# Altium PCB MainBoard_Layout_V2.PcbDoc
Units mil, origin at the board's own origin, x right, y up, seen from the top; angles counter-clockwise.
Board outline 4300 x 3500 mil, 4 copper layers (Top Layer 1, Top Layer, Bottom Layer, Bottom Layer 1), stack 19.156 mil thick; 78 components, 222 nets, 502 pads, 0 vias.
Unrouted connection lines stored in the file: 272.
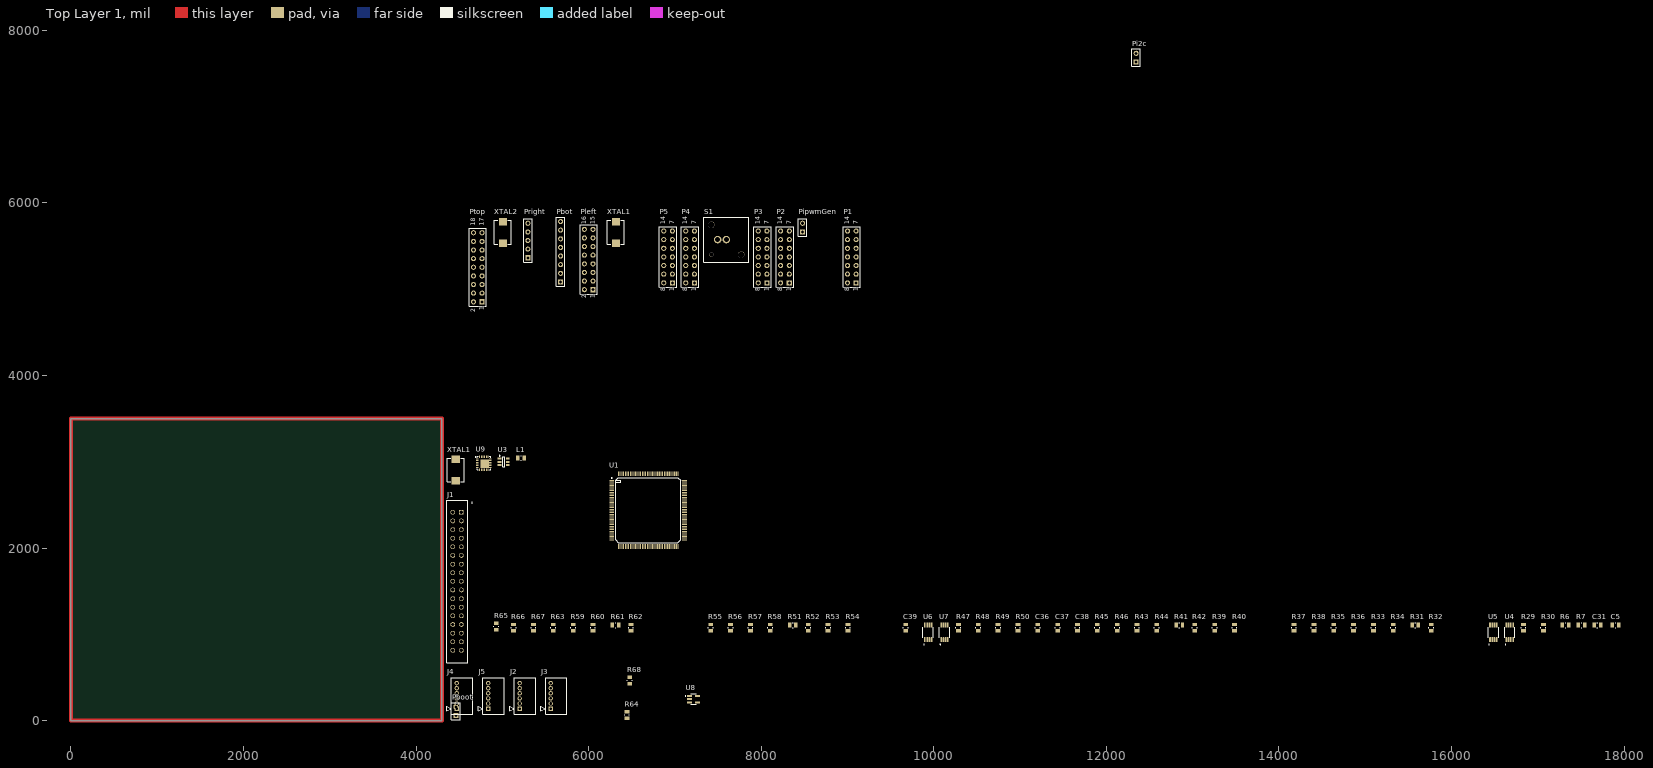
[diagram p0: Top Layer 1 view]
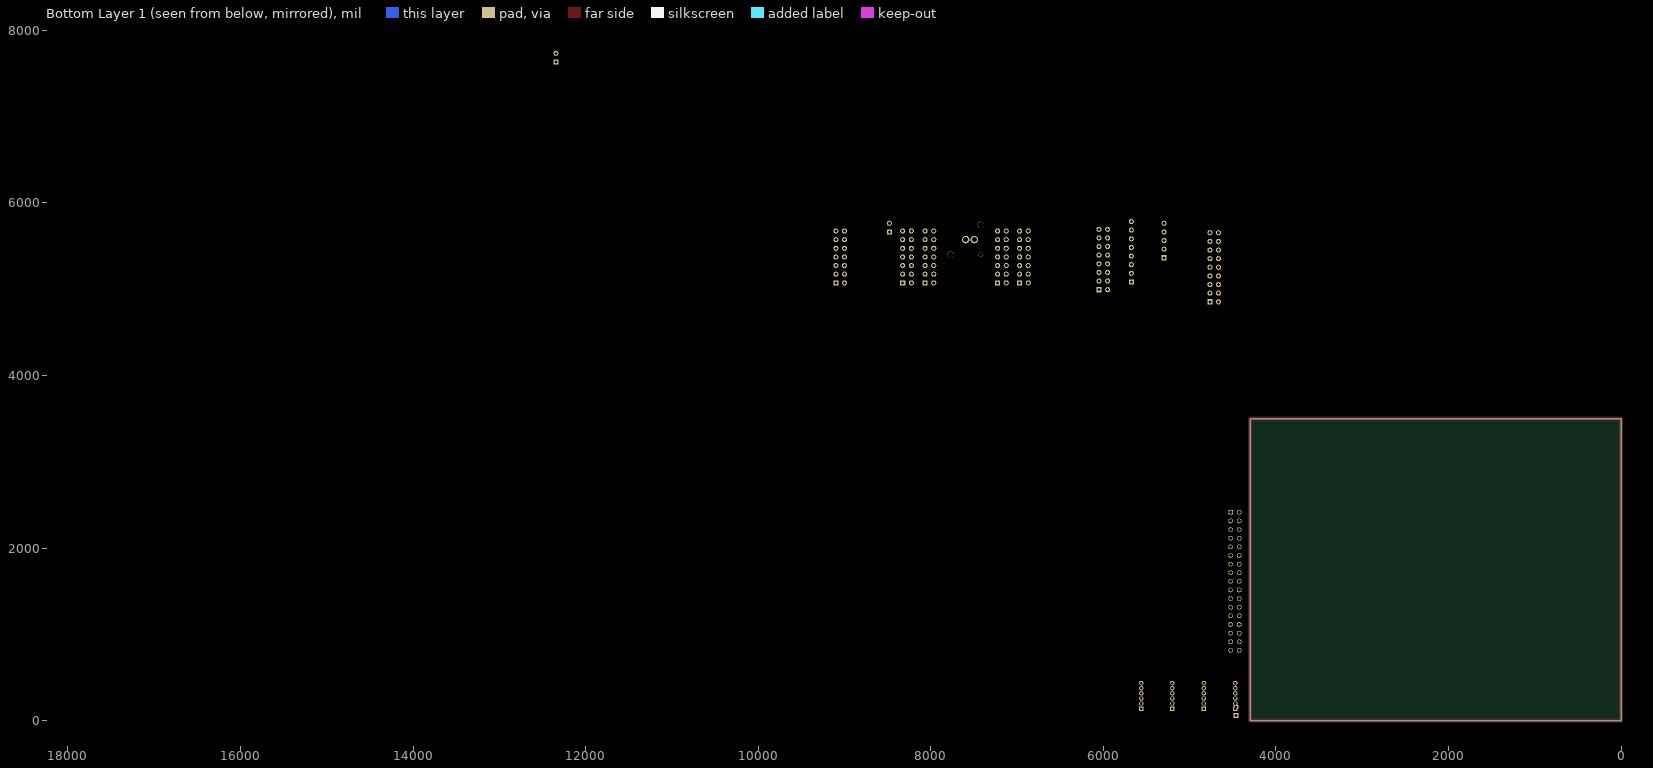
[diagram p1: Bottom Layer 1 view, seen from below]

## Layer stack, top to bottom
Top Solder: solder mask 0.4, Solder Resist, Dk 3.5
Top Layer 1: signal copper 1.378
Dielectric 2: prepreg 2.8, PP-006, Dk 4.1
Top Layer: signal copper 1.4
Dielectric 1: core 8, Core-025, Dk 4.6
Bottom Layer: signal copper 1.4
Dielectric 3: prepreg 2.8, PP-006, Dk 4.1
Bottom Layer 1: signal copper 1.378
Bottom Solder: solder mask 0.4, Solder Resist, Dk 3.5

## Board outline
0,0 4300,0 4300,3500 0,3500

## Design rules (kind name [scope] priority, off if disabled: settings)
Clearance [All] p1: gap=10 ignorepadtopadclearanceinfootprint=FALSE except(0: Arc-Hole Track-Hole SMDPad-Hole THPad-Hole Via-Hole Fill-Hole Poly-Hole Region-Hole Text-Hole)
DiffPairsRouting [All] p1: maxlimit=10 minlimit=10 mostfreqgap=10 toplayer_minwidth=15 toplayer_maxwidth=15 toplayer_prefwidth=15 midlayer1_minwidth=15 midlayer1_maxwidth=15 midlayer1_prefwidth=15 midlayer2_minwidth=15 midlayer2_maxwidth=15 midlayer2_prefwidth=15 bottomlayer_minwidth=15 bottomlayer_maxwidth=15 bottomlayer_prefwidth=15 maxuncoupledlength=500
MatchedLengths "Schematic Matched Net Lengths_3" [InNet('RD_P')] p1: tolerance=100 checknetsindiffpair=TRUE checkdiffpairvsdiffpair=FALSE checkxsignals=FALSE checkothers=FALSE
MatchedLengths "Schematic Matched Net Lengths_2" [InNet('RD_N')] p2: tolerance=100 checknetsindiffpair=TRUE checkdiffpairvsdiffpair=FALSE checkxsignals=FALSE checkothers=FALSE
MatchedLengths "Schematic Matched Net Lengths_1" [InNet('TD_N')] p3: tolerance=100 checknetsindiffpair=TRUE checkdiffpairvsdiffpair=FALSE checkxsignals=FALSE checkothers=FALSE
MatchedLengths "Schematic Matched Net Lengths" [InNet('TD_P')] p4: tolerance=100 checknetsindiffpair=TRUE checkdiffpairvsdiffpair=FALSE checkxsignals=FALSE checkothers=FALSE
PolygonConnect [All] p1: connectstyle=Relief reliefconductorwidth=10 reliefentries=4 polygonreliefangle="90 Angle" airgapwidth=10
RoomDefinition U_Mainboard_RMII_Interface [InComponentClass('U_Mainboard_RMII_Interface')] p1: confinementstyle=ConfineIn formatcopy=TRUE lockcomponents=FALSE outline 4345,2720 5290,2720 5290,3190 4345,3190
RoomDefinition U_Mainboard_Power_Interface [InComponentClass('U_Mainboard_Power_Interface')] p2: confinementstyle=ConfineIn formatcopy=TRUE lockcomponents=FALSE outline 4345,660 4660,660 4660,2670 4345,2670
RoomDefinition U_Mainboard_MCU_Func [InComponentClass('U_Mainboard_MCU_Func')] p3: confinementstyle=ConfineIn formatcopy=TRUE lockcomponents=FALSE outline 4345,2720 5105,2720 5105,3190 4345,3190
RoomDefinition U_MainBoard_MCU_Breakout [InComponentClass('U_MainBoard_MCU_Breakout')] p4: confinementstyle=ConfineIn formatcopy=TRUE lockcomponents=FALSE outline 5755,1950 7755,1950 7755,2950 5755,2950
RoomDefinition U_Mainboard_Encoder_Interface [InComponentClass('U_Mainboard_Encoder_Interface')] p5: confinementstyle=ConfineIn formatcopy=TRUE lockcomponents=FALSE outline 4345,60 5765,60 5765,615 4345,615
RoomDefinition U_Mainboard_Motordriver_Interface [InComponentClass('U_Mainboard_Motordriver_Interface')] p6: confinementstyle=ConfineIn formatcopy=TRUE lockcomponents=FALSE outline 4295,3860 4785,3860 4785,4240 4295,4240
RoomDefinition MainBoard_Top [InComponentClass('MainBoard_Top')] p7: confinementstyle=ConfineIn formatcopy=TRUE lockcomponents=FALSE outline 4400,0 4695,0 4695,320 4400,320
RoutingVias [All] p1: holewidth=28 width=50 viastyle="Through Hole" minholewidth=28 minwidth=50 maxholewidth=28 maxwidth=50
SolderMaskExpansion [All] p1: expansion=4 istentingtop=FALSE
Width [All] p1: maxlimit=10 minlimit=10 preferedwidth=10
29 further rules are at their usual default settings.

## Classes and differential pairs
component class U_Mainboard_RMII_Interface: C1 C2 C3 C4 C30 C44 C45 C46 C47 C48 C49 C50 J6 L1 R1 R2 R3 R4 R69 R70 R71 R72 R73 R74 R75 R76 R77 R78 R79 R80 R81 R82 R83 R84 R85 R86 T1 U3 U9 XTAL1
component class U_Mainboard_Power_Interface: J1
component class U_Mainboard_MCU_Func: C1 C2 C3 C4 C30 HW? Pbot PipwmGen Pleft Pright Ptop R1 R2 R3 R4 S1 U3 XTAL1 XTAL2
component class U_MainBoard_MCU_Breakout: Pi2c R19 R20 R21 U1
component class U_Mainboard_Motordriver_Interface: C1 C2 C3 C4 C30 HW? P1 P2 P3 P4 P5 R1 R2 R3 R4 R19 R20 R21 U3
component class U_Mainboard_Encoder_Interface: C5 C31 C36 C37 C38 C39 J2 J3 J4 J5 R6 R7 R29 R30 R31 R32 R33 R34 R35 R36 R37 R38 R39 R40 R41 R42 R43 R44 R45 R46 R47 R48 R49 R50 R51 R52 R53 R54 R55 R56 R57 R58 R59 R60 R61 R62 R63 R64 R65 R66 R67 R68 U4 U5 U6 U7 U8 Um1 Up1
component class MainBoard_Top: Pboot
differential pair TD: +TD_P -TD_N
differential pair RD: +RD_P -RD_N

## Components (designator, comment, footprint, x,y, rotation, side; value= is the part's Value field where it differs from the comment)
C5 "10nF 50V" 0805 17900,1108 r0 top value=10nF
C31 "10nF 50V" 0805 17690,1108 r0 top value=10nF
C36 "10nF 50V" 0805 11205,1078 r90 top value=10nF
C37 "1uF 50V" 0805 11435,1078 r90 top value=1uF
C38 "10nF 50V" 0805 11665,1078 r90 top value=10nF
C39 "10nF 50V" 0805 9675,1078 r90 top value=10nF
J1 "0.1\" Header Female 34" SAMTEC_ESQ-117-12-L-D 4525,2415 r90 top
J2 "1.5mm" "6POS JST" 5200,140 r90 top
J3 "1.5mm" "6POS JST" 5560,140 r90 top
J4 "1.5mm" "6POS JST" 4470,140 r90 top
J5 "1.5mm" "6POS JST" 4835,140 r90 top
L1 "IND 100UH 50MA 4 OHM SMD" 0805 5215,3045 r0 top value=100uH
P1 "Motor1" HDR2X7_CEN 9100,5075 r90 top
P2 "Motor2" HDR2X7_CEN 8325,5075 r90 top
P3 "Motor3" HDR2X7_CEN 8065,5075 r90 top
P4 "Motor4" HDR2X7_CEN 7225,5075 r90 top
P5 "Motor5" HDR2X7_CEN 6970,5075 r90 top
Pboot "Header 2" HDR1X2 4460,60 r90 top
Pbot "Bottom Side Connector - Extra Pins" HDR1X8 5675,5085 r90 top
Pi2c "Header 2" HDR1X2 12345,7635 r90 top
PipwmGen "Header 2" HDR1X2 8480,5665 r90 top
Pleft "Left Side Connector Extra Pins" HDR2X8 6050,4995 r90 top
Pright "Right Side Connector - Extra Pins" HDR1X5 5295,5365 r90 top
Ptop "Top side Connector Extra Pins" HDR2X9 4765,4855 r90 top
R6 "330" 0805 17320,1108 r0 top
R7 "100k" 0805 17505,1108 r0 top
R29 "330" 0805 16835,1078 r90 top
R30 "100k" 0805 17065,1078 r90 top
R31 "330" 0805 15580,1108 r0 top
R32 "100k" 0805 15765,1078 r90 top
R33 "330" 0805 15095,1078 r90 top
R34 "100k" 0805 15325,1078 r90 top
R35 "330" 0805 14635,1078 r90 top
R36 "100k" 0805 14865,1078 r90 top
R37 "330" 0805 14175,1078 r90 top
R38 "100k" 0805 14405,1078 r90 top
R39 "330" 0805 13255,1078 r90 top
R40 "100k" 0805 13485,1078 r90 top
R41 "330" 0805 12845,1108 r0 top
R42 "100k" 0805 13025,1078 r90 top
R43 "64.9k" 0805 12355,1078 r90 top
R44 "64.9k" 0805 12585,1078 r90 top
R45 "64.9k" 0805 11895,1078 r90 top
R46 "64.9k" 0805 12125,1078 r90 top
R47 "330" 0805 10285,1078 r90 top
R48 "100k" 0805 10515,1078 r90 top
R49 "330" 0805 10745,1078 r90 top
R50 "100k" 0805 10975,1078 r90 top
R51 "330" 0805 8365,1108 r0 top
R52 "100k" 0805 8545,1078 r90 top
R53 "330" 0805 8775,1078 r90 top
R54 "100k" 0805 9005,1078 r90 top
R55 "330" 0805 7415,1078 r90 top
R56 "100k" 0805 7645,1078 r90 top
R57 "330" 0805 7875,1078 r90 top
R58 "100k" 0805 8105,1078 r90 top
R59 "330" 0805 5820,1078 r90 top
R60 "100k" 0805 6050,1078 r90 top
R61 "330" 0805 6310,1108 r0 top
R62 "100k" 0805 6490,1078 r90 top
R63 "100k" 0805 5590,1078 r90 top
R64 "64.9k" 0805 6445,66.75 r90 top
R65 "64.9k" 0805 4930,1093 r90 top
R66 "64.9k" 0805 5130,1078 r90 top
R67 "64.9k" 0805 5360,1078 r90 top
R68 "100k" 0805 6475,465 r90 top
S1 "SPST-NO 0.3A 28V" PB300STQ 7595,5575 r0 top
U1 "STM32H743ZI" STM32H7 6690,2440 r0 top
U3 "USBLC6-4SC6" SOT23-6L 5015,3000 r0 top
U4 "OP AMP DUAL" 8-MSOP 16675,1023 r90 top
U5 "OP AMP DUAL" 8-MSOP 16485,1023 r90 top
U6 "OP AMP DUAL" 8-MSOP 9935,1023 r90 top
U7 "OP AMP DUAL" 8-MSOP 10125,1023 r90 top
U8 "OP AMP SINGLE" SOT95P280X145-5N 7215,250 r0 top
U9 "LAN8742A-CZ-TR" "24-QFN (4x4)" 4785,2985 r0 top
XTAL1 "CRYSTAL 25.0000MHZ 8PF SMD" SMD-2 4460,2905 r90 top
XTAL1 "CRYSTAL 25.0000MHZ 8PF SMD" SMD-2 6315,5660 r90 top
XTAL2 "CRYSTAL 32.7680KHZ 12.5PF SMD" SMD-2 5005,5660 r90 top

## Footprints (in the part's own frame and the unit in brackets; to place one, negate y for a bottom-side part, rotate by r counter-clockwise, add the part's x,y. Pads: shape width x height; smd on the part's side, far side on the other; paste and mask are expansions set on the pad)
"6POS JST" [mil]
  rect 50x50 hole 30 mask+0: 1(0,0)
  round 50 hole 30 mask+0: 2(59.06,0) 3(118.11,0) 4(177.17,0) 5(236.22,0) 6(295.28,0)
  silkscreen extent -64,-186 359,115, body extent 0,0 10,10, height 10
8-MSOP [mm]
  rrect25% 1.47x0.48 smd: 1(-2.15,0.975) 2(-2.15,0.325) 3(-2.15,-0.325) 4(-2.15,-0.975) 5(2.15,-0.975) 6(2.15,-0.325) 7(2.15,0.325) 8(2.15,0.975)
  silkscreen extent -3.62,-1.54 1.5,1.54, body extent -2.55,-1.6 2.6,1.6, height 1.09
"24-QFN (4x4)" [mm]
  rect 0.71x0.27 smd: 1(-1.9,1.25) 2(-1.9,0.75) 3(-1.9,0.25) 4(-1.9,-0.25) 5(-1.9,-0.75) 6(-1.9,-1.25) 13(1.9,-1.25) 14(1.9,-0.75) 15(1.9,-0.25) 16(1.9,0.25) 17(1.9,0.75) 18(1.9,1.25)
  rect 0.27x0.71 smd: 7(-1.25,-1.9) 8(-0.75,-1.9) 9(-0.25,-1.9) 10(0.25,-1.9) 11(0.75,-1.9) 12(1.25,-1.9) 19(1.25,1.9) 20(0.75,1.9) 21(0.25,1.9) 22(-0.25,1.9) 23(-0.75,1.9) 24(-1.25,1.9)
  rect 2.5x2.5 smd: 25(0.25,-0.25)
  silkscreen extent -2.55,-2 2,2, body extent -2.05,-2.04 2.05,2.05, height 1.4
0805 [mil]
  rect 40x55 smd: 1(-37,0) 2(37,0)
  silkscreen extent -4,-28 4,28, body extent -47,-28 47,28, height 24
HDR1X2 [mm] "Connector; Header; 2 Position"
  rect 1.5x1.5 hole 0.9: 1(0,0)
  round 1.5 hole 0.9: 2(2.54,0)
  silkscreen extent -1.27,-1.27 3.81,1.27
HDR1X5 [mm] "Connector; Header; 5 Position"
  rect 1.5x1.5 hole 0.9: 1(0,0)
  round 1.5 hole 0.9: 2(2.54,0) 3(5.08,0) 4(7.62,0) 5(10.16,0)
  silkscreen extent -1.27,-1.27 11.43,1.27
HDR1X8 [mm] "Connector; Header; 8 Position"
  rect 1.5x1.5 hole 0.9: 1(0,0)
  round 1.5 hole 0.9: 2(2.54,0) 3(5.08,0) 4(7.62,0) 5(10.16,0) 6(12.7,0) 7(15.24,0) 8(17.78,0)
  silkscreen extent -1.27,-1.27 19.05,1.27
HDR2X7_CEN [mm] "Connector; Header; 7x2 Position"
  rect 1.5x1.5 hole 0.9: 1(0,0)
  round 1.5 hole 0.9: 2(2.54,0) 3(5.08,0) 4(7.62,0) 5(10.16,0) 6(12.7,0) 7(15.24,0) 8(0,2.54) 9(2.54,2.54) 10(5.08,2.54) 11(7.62,2.54) 12(10.16,2.54) 13(12.7,2.54) 14(15.24,2.54)
  silkscreen extent -1.27,-1.27 16.51,3.81
HDR2X8 [mm] "Connector; Header; 8x2 Position"
  rect 1.5x1.5 hole 0.9: 1(0,0)
  round 1.5 hole 0.9: 2(0,2.54) 3(2.54,0) 4(2.54,2.54) 5(5.08,0) 6(5.08,2.54) 7(7.62,0) 8(7.62,2.54) 9(10.16,0) 10(10.16,2.54) 11(12.7,0) 12(12.7,2.54) 13(15.24,0) 14(15.24,2.54) 15(17.78,0) 16(17.78,2.54)
  silkscreen extent -1.27,-1.27 19.05,3.81
HDR2X9 [mm] "Connector; Header; 9x2 Position"
  rect 1.5x1.5 hole 0.9: 1(0,0)
  round 1.5 hole 0.9: 2(0,2.54) 3(2.54,0) 4(2.54,2.54) 5(5.08,0) 6(5.08,2.54) 7(7.62,0) 8(7.62,2.54) 9(10.16,0) 10(10.16,2.54) 11(12.7,0) 12(12.7,2.54) 13(15.24,0) 14(15.24,2.54) 15(17.78,0) 16(17.78,2.54) 17(20.32,0) 18(20.32,2.54)
  silkscreen extent -1.27,-1.27 21.59,3.81
PB300STQ [mm] "SWITCH PUSH SPST-NO 0.3A 28V"
  round 2.175 hole 1.45: 1(0,0) 2(-2.54,0)
  round 1.86 hole 1.86 unplated: 3(-4.4,4.4) 5(4.4,-4.4)
  round 1.2 hole 1.2 unplated: 4(-4.4,-4.4)
  silkscreen extent -6.6,-6.6 6.6,6.6, body extent -6.2,-6.2 6.2,6.2, height 10.35
SAMTEC_ESQ-117-12-L-D [mm]
  rect 1.37x1.37 hole 1.02: 1(0,0)
  round 1.37 hole 1.02: 2(0,2.54) 3(-2.54,0) 4(-2.54,2.54) 5(-5.08,0) 6(-5.08,2.54) 7(-7.62,0) 8(-7.62,2.54) 9(-10.16,0) 10(-10.16,2.54) 11(-12.7,0) 12(-12.7,2.54) 13(-15.24,0) 14(-15.24,2.54) 15(-17.78,0) 16(-17.78,2.54) 17(-20.32,0) 18(-20.32,2.54) 19(-22.86,0) 20(-22.86,2.54) 21(-25.4,0) 22(-25.4,2.54) 23(-27.94,0) 24(-27.94,2.54) 25(-30.48,0) 26(-30.48,2.54) 27(-33.02,0) 28(-33.02,2.54) 29(-35.56,0) 30(-35.56,2.54) 31(-38.1,0) 32(-38.1,2.54) 33(-40.64,0) 34(-40.64,2.54)
  silkscreen extent -44.3,-3.2 3.6,4.3, body extent -44.21,-2.95 3.54,4.25, height 9.5
SMD-2 [mm]
  rect 2.2x2.4 smd: 1(-3.15,0) 2(3.15,0)
  silkscreen extent -3.5,-2.5 3.5,2.5
SOT23-6L [mm]
  rect 1.1x0.6 smd: 1(-1.2,0.95) 2(-1.2,0) 3(-1.2,-0.95) 4(1.2,-0.95) 5(1.2,0) 6(1.2,0.95)
  silkscreen extent -1.32,-1.5 0.25,1.92, body extent -0.86,-1.51 0.87,1.52, height 1.25
SOT95P280X145-5N [mm]
  rrect25% 1.39x0.6 smd: 1(-1.165,0.95) 2(-1.165,0) 3(-1.165,-0.95) 4(1.165,-0.95) 5(1.165,0.95)
  silkscreen extent -2.46,-1.57 0.8,1.57, body extent -1.5,-1.5 1.5,1.5, height 1.45
STM32H7 [mm] "STM32H743ZI 144 pin"
  rect 0.3x1.45 smd: BOOT0(-5.75,10.725) PA3(-8.75,-10.725) PA4(-7.25,-10.725) PA5(-6.75,-10.725) PA6(-6.25,-10.725) PA7(-5.75,-10.725) PA14(8.75,10.725) PA15(8.25,10.725) PB0(-4.25,-10.725) PB1(-3.75,-10.725) PB2(-3.25,-10.725) PB3(-3.25,10.725) PB4(-3.75,10.725) PB5(-4.25,10.725) PB6(-4.75,10.725) PB7(-5.25,10.725) PB8(-6.25,10.725) PB9(-6.75,10.725) PB10(7.25,-10.725) PB11(7.75,-10.725) PC4(-5.25,-10.725) PC5(-4.75,-10.725) PC10(7.75,10.725) PC11(7.25,10.725) PC12(6.75,10.725) PD0(6.25,10.725) PD1(5.75,10.725) PD2(5.25,10.725) PD3(4.75,10.725) PD4(4.25,10.725) PD5(3.75,10.725) PD6(2.25,10.725) PD7(1.75,10.725) PDR_ON(-8.25,10.725) PE0(-7.25,10.725) PE1(-7.75,10.725) PE7(1.75,-10.725) PE8(2.25,-10.725) PE9(2.75,-10.725) PE10(4.25,-10.725) PE11(4.75,-10.725) PE12(5.25,-10.725) PE13(5.75,-10.725) PE14(6.25,-10.725) PE15(6.75,-10.725) PF11(-2.75,-10.725) PF12(-2.25,-10.725) PF13(-0.75,-10.725) PF14(-0.25,-10.725) PF15(0.25,-10.725) PG0(0.75,-10.725) PG1(1.25,-10.725) PG9(1.25,10.725) PG10(0.75,10.725) PG11(0.25,10.725) PG12(-0.25,10.725) PG13(-0.75,10.725) PG14(-1.25,10.725) PG15(-2.75,10.725) VCAP(8.25,-10.725) VDD(-8.75,10.725) VDD(-7.75,-10.725) VDD(-2.25,10.725) VDD(-1.25,-10.725) VDD(2.75,10.725) VDD(3.75,-10.725) VDD(8.75,-10.725) VSS(-8.25,-10.725) VSS(-1.75,-10.725) VSS(-1.75,10.725) VSS(3.25,-10.725) VSS(3.25,10.725)
  rect 1.45x0.3 smd: NRST(-10.725,-3.25) PA0(-10.725,-7.75) PA1(-10.725,-8.25) PA2(-10.725,-8.75) PA8(10.725,4.75) PA9(10.725,5.25) PA10(10.725,5.75) PA11(10.725,6.25) PA12(10.725,6.75) PA13(10.725,7.25) PB12(10.725,-8.75) PB13(10.725,-8.25) PB14(10.725,-7.75) PB15(10.725,-7.25) PC0(-10.725,-3.75) PC1(-10.725,-4.25) PC2(-10.725,-4.75) PC3(-10.725,-5.25) PC6(10.725,2.75) PC7(10.725,3.25) PC8(10.725,3.75) PC9(10.725,4.25) PC13(-10.725,5.75) PC14(-10.725,5.25) PC15(-10.725,4.75) PD8(10.725,-6.75) PD9(10.725,-6.25) PD10(10.725,-5.75) PD11(10.725,-5.25) PD12(10.725,-4.75) PD13(10.725,-4.25) PD14(10.725,-2.75) PD15(10.725,-2.25) PE2(-10.725,8.75) PE3(-10.725,8.25) PE4(-10.725,7.75) PE5(-10.725,7.25) PE6(-10.725,6.75) PF0(-10.725,4.25) PF1(-10.725,3.75) PF2(-10.725,3.25) PF3(-10.725,2.75) PF4(-10.725,2.25) PF5(-10.725,1.75) PF6(-10.725,0.25) PF7(-10.725,-0.25) PF8(-10.725,-0.75) PF9(-10.725,-1.25) PF10(-10.725,-1.75) PG2(10.725,-1.75) PG3(10.725,-1.25) PG4(10.725,-0.75) PG5(10.725,-0.25) PG6(10.725,0.25) PG7(10.725,0.75) PG8(10.725,1.25) PH0(-10.725,-2.25) PH1(-10.725,-2.75) VBAT(-10.725,6.25) VCAP(10.725,7.75) VDD(-10.725,-5.75) VDD(-10.725,0.75) VDD(10.725,-3.25) VDD(10.725,8.75) VDD33USB(10.725,2.25) VDDA(-10.725,-7.25) VREF+(-10.725,-6.75) VSS(-10.725,1.25) VSS(10.725,-3.75) VSS(10.725,1.75) VSS(10.725,8.25) VSSA(-10.725,-6.25)
  silkscreen extent -10.85,-9.6 9.6,9.6, body extent -10,-10 10,10, height 1.6

## Part data
C5 C31 C36 C38 C39: library part "CAP 10nF 50V", "CAP CER 10000PF 50V X7R 0805", Operating Temperature="-55°C ~ 125°C", Package=0805, Rating=50V, Temperature Coefficient=X7R, Tolerance=10%
C37: library part "CAP 1uF 50V", "CAP CER 1UF 50V X7R 0805", Operating Temperature="-55°C ~ 125°C", Package=0805, Rating=50V, Temperature Coefficient=X7R, Tolerance=10%
J1: library part "CN HDR 34POS 2x17", "Female Header THRU 34POS 2ROW 0.1\" (2.54mm) pitch"
J2 J3 J4 J5: library part "CN 6POS JST RA", "Conn Shrouded Header HDR 6 POS 1.5mm Solder RA Thru-Hole Box", Color=White, Contact Resistance=30mR, Current Rating=1A, Flammability Rating="UL94 V-0", Housing Color=Beige, Insulation Color=Natural, Insulation Resistance=500MR, Manufacturer=JST, Manufacturer Part Number=S6B-ZR(LF)(SN), Max Operating Temperature=85°C, Max Voltage Rating (AC)=50V, Min Operating Temperature=-25°C, Supplier Part Number 1=455-1673-ND, Body Plating=Tin, Category="Headers and Wire Housings", ComponentLink1Description=https://datasheet.ciiva.com/8052/80556-8052225.pdf?src-supplier=Element14, ComponentLink1URL=https://datasheet.ciiva.com/8052/80556-8052225.pdf?src-supplier=Element14, ComponentLink2Description=https://datasheet.ciiva.com/25617/0900766b81147f94-25617345.pdf?src-supplier=RSComponents, ComponentLink2URL=https://datasheet.ciiva.com/25617/0900766b81147f94-25617345.pdf?src-supplier=RSComponents, ComponentLink3Description=https://datasheet.ciiva.com/11752/0900766b8082f593-11752194.pdf?src-supplier=RSComponents, ComponentLink3URL=https://datasheet.ciiva.com/11752/0900766b8082f593-11752194.pdf?src-supplier=RSComponents, ComponentLink4Description=https://datasheet.ciiva.com/26894/getdatasheetpartid-642095-26894637.pdf?src-supplier=Verical, ComponentLink4URL=https://datasheet.ciiva.com/26894/getdatasheetpartid-642095-26894637.pdf?src-supplier=Verical, ComponentLink5Description=https://datasheet.ciiva.com/712/ezh-712560.pdf?src-supplier=Digi-Key, ComponentLink5URL=https://datasheet.ciiva.com/712/ezh-712560.pdf?src-supplier=Digi-Key, ComponentLink6Description=https://datasheet.ciiva.com/16484/s6b-zrlfsn-16484554.pdf?src-supplier=Future+Electronics, ComponentLink6URL=https://datasheet.ciiva.com/16484/s6b-zrlfsn-16484554.pdf?src-supplier=Future+Electronics, Connector Type="Header,Male Pin", Contact Material=Brass,Tin,Copper, Contact Mating Length=0.094inch, Contact Plating=Tin,Copper, Contact Shape=Circular, Depth=6mm, Fastening Type=Detent, Gender=Male, Height=7.2mm, Housing Material=Polyamide, Insulation Material=Nylon, Lead Free="Lead Free", Lead Pitch=1.5mm, Length=10.5mm, Material=Nylon, Max Current Rating=1A, Mount="Through Hole", Number of Contacts=6, Number of Pins=6, Number of Positions=6, Number of Rows=1, Orientation="Right Angle", Packaging=Bulk, Panel Thickness=3.5mm, Pitch=1.5mm, REACH SVHC="No SVHC", RoHS=Yes, Stock 1=14808, Supplier 1=Digi-Key, Termination=Solder, Voltage Rating=50V, Voltage Rating (AC)=50V, Voltage Rating (DC)=50V, Width=3.5mm
L1: "100µH Unshielded Wirewound Inductor 50mA 4Ohm 0805 (2012 Metric)", Digikey=587-2048-1-ND, Digikey Link=https://www.digikey.ca/product-detail/en/taiyo-yuden/LBR2012T101K/587-2048-1-ND/1788995, MF="Taiyo Yuden", MP=LBR2012T101K, Revision="July-2002: Re-released for DXP Platform."
P1 P2 P3 P4 P5: library part "Header 7X2A", "Header, 7-Pin, Dual row", LatestRevisionDate=17-Jul-2002, LatestRevisionNote="Re-released for DXP Platform.", Publisher="Altium Limited"
Pboot Pi2c PipwmGen: "Header, 2-Pin", LatestRevisionDate=17-Jul-2002, LatestRevisionNote="Re-released for DXP Platform.", Publisher="Altium Limited"
Pbot: library part "Header 8", "Header, 8-Pin", LatestRevisionDate=17-Jul-2002, LatestRevisionNote="Re-released for DXP Platform.", Publisher="Altium Limited"
Pleft: library part "Header 8X2", "Header, 8-Pin, Dual row", LatestRevisionDate=17-Jul-2002, LatestRevisionNote="Re-released for DXP Platform.", Publisher="Altium Limited"
Pright: library part "Header 5", "Header, 5-Pin", LatestRevisionDate=17-Jul-2002, LatestRevisionNote="Re-released for DXP Platform.", Publisher="Altium Limited"
Ptop: library part "Header 9X2", "Header, 9-Pin, Dual row", LatestRevisionDate=17-Jul-2002, LatestRevisionNote="Re-released for DXP Platform.", Publisher="Altium Limited"
R6 R29 R31 R33 R35 R37 R39 R41 R47 R49 R51 R53 R55 R57 R59 R61: library part "RES 330.0 1/8W - 1%", "RES SMD 330 OHM 1% 1/8W 0805", Package=0805, Rating=0.125W, Tolerance=1%
R7 R30 R32 R34 R36 R38 R40 R42 R48 R50 R52 R54 R56 R58 R60 R62 R63 R68: library part "RES 100k 1/8W - 1%", "RES SMD 100K OHM 1% 1/8W 0805", Package=0805, Power (Watts)=0.125W, Tolerance=1%
R43 R44 R45 R46 R64 R65 R66 R67: library part "RES 64.9k 1/8W", "RES SMD 64.9K OHM 1% 1/8W 0805", Package=0805, Power (Watts)=0.125W, Tolerance=1%, ComponentLink1Description=digikey, ComponentLink1URL=https://www.digikey.ca/en/products/detail/yageo/RC0805FR-0764K9L/728090
S1: library part "SW PUSH NO", "Pushbutton Switch SPST-NO Standard Through Hole", Rating="28V 0.3A", ComponentLink1Description=Digikey, ComponentLink1URL=https://www.digikey.ca/product-detail/en/e-switch/PB300STQ/EG5398-ND/6126493, ComponentLink2Description=Datasheet, ComponentLink2URL=https://sten-eswitch-13110800-production.s3.amazonaws.com/system/asset/product_line/data_sheet/222/PB300.pdf, Digikey=EG5398-ND, Digikey Link=https://www.digikey.ca/product-detail/en/e-switch/PB300STQ/EG5398-ND/6126493, MF=E-Switch, MP=PB300STQ, Price="3.40000 CAD"
U1: Package="144-LQFP (20x20)", Digikey=497-17721-ND, Digikey Link=https://www.digikey.ca/product-detail/en/stmicroelectronics/STM32H743ZIT6/497-17721-ND/7809238, MF=STMicroelectronics, MP=STM32H743ZIT6
U4 U5 U6 U7: "IC OPAMP VFB 50KHZ RRO 8MSOP", Case/Package=MSOP, Input Bias Current=0.5pA, Input Capacitance=4.7pF, Input Offset Voltage (Vos)=3mV, Manufacturer="Analog Devices", Manufacturer Part Number=ADA4505-2ARMZ, Max Dual Supply Voltage=2.5V, Max Input Voltage=5V, Max Operating Temperature=125°C, Min Dual Supply Voltage=900mV, Min Operating Temperature=-40°C, Min Supply Voltage=1.8V, Nominal Supply Current=7uA, Operating Supply Current=14uA, Operating Supply Voltage=3V, Output Current per Channel=40mA, Package Quantity=50, Power Supply Rejection Ratio (PSRR)=110dB, Supplier Part Number 1=ADA4505-2ARMZ-ND, Voltage Gain=120dB, Bandwidth=50kHz, Category="Amplifiers - Op Amps, Buffer, Instrumentation", Common Mode Rejection Ratio=105dB, ComponentLink1Description=https://datasheet.ciiva.com/24017/ada4505-1-4505-2-4505-4-249280-24017665.pdf?src-supplier=Mouser, ComponentLink1URL=https://datasheet.ciiva.com/24017/ada4505-1-4505-2-4505-4-249280-24017665.pdf?src-supplier=Mouser, ComponentLink2Description=https://datasheet.ciiva.com/2974/ada4505-1-4505-2-4505-4-2974772.pdf?src-supplier=Avnet, ComponentLink2URL=https://datasheet.ciiva.com/2974/ada4505-1-4505-2-4505-4-2974772.pdf?src-supplier=Avnet, ComponentLink3Description=https://datasheet.ciiva.com/17569/ada4505-1-4505-2-4505-4-17569270.pdf?src-supplier=Avnet+Europe, ComponentLink3URL=https://datasheet.ciiva.com/17569/ada4505-1-4505-2-4505-4-17569270.pdf?src-supplier=Avnet+Europe, ComponentLink4Description=https://datasheet.ciiva.com/1805/ada4505-1-4505-2-4505-4-1805784.pdf?src-supplier=Digi-Key, ComponentLink4URL=https://datasheet.ciiva.com/1805/ada4505-1-4505-2-4505-4-1805784.pdf?src-supplier=Digi-Key, Contact Plating=Tin,Matte, Gain Bandwidth Product=50kHz, Height=0.95mm, Lead Free="Contains Lead", Length=3.2mm, Max Supply Voltage=5V, Number of Amplifiers=2, Number of Channels=2, Number of Circuits=2, Number of Elements=2, Number of Pins=8, Packaging=Rail/Tube, Quiescent Current=7uA, REACH SVHC="No SVHC", RoHS=Yes, Slew Rate=0.006V/µs, Stock 1=767, Supplier 1=Digi-Key, Supply Type=Single,Dual, Unity Gain Bandwidth Product=50kHz, Width=3.2mm
U8: "ANALOG DEVICES - ADA4505-1ARJZ-R7 - IC, AMPLIF. OPER., R-R, CMOS, SOT23-5", Case/Package=SOT-23-5, Input Bias Current=500nA, Input Capacitance=4.7pF, Input Offset Voltage (Vos)=3mV, Manufacturer="Analog Devices", Manufacturer Part Number=ADA4505-1ARJZ-R7, Max Dual Supply Voltage=2.5V, Max Operating Temperature=125°C, Max Supply Voltage=5V, Min Dual Supply Voltage=900mV, Min Operating Temperature=-40°C, Min Supply Voltage=1.8V, Operating Supply Current=9uA, Operating Supply Voltage=3V, Output Current per Channel=40mA, Package Quantity=3000, Power Supply Rejection Ratio (PSRR)=110dB, Supplier Part Number 1=ADA4505-1ARJZ-R7CT-ND, Voltage Gain=120dB, Bandwidth=50kHz, Category="Amplifiers - Op Amps, Buffer, Instrumentation", Common Mode Rejection Ratio=105dB, ComponentLink1Description=https://datasheet.ciiva.com/22712/1610797-22712032.pdf?src-supplier=Element14, ComponentLink1URL=https://datasheet.ciiva.com/22712/1610797-22712032.pdf?src-supplier=Element14, ComponentLink2Description=https://datasheet.ciiva.com/23805/608874-23805844.pdf?src-supplier=Newark, ComponentLink2URL=https://datasheet.ciiva.com/23805/608874-23805844.pdf?src-supplier=Newark, ComponentLink3Description=https://datasheet.ciiva.com/1487/1610797-1487372.pdf?src-supplier=Element14, ComponentLink3URL=https://datasheet.ciiva.com/1487/1610797-1487372.pdf?src-supplier=Element14, Contact Plating=Tin,Matte, Gain Bandwidth Product=50kHz, Lead Free="Contains Lead", Number of Amplifiers=1, Number of Channels=1, Number of Circuits=1, Number of Elements=1, Number of Pins=5, Packaging="Tape and Reel", Quiescent Current=9uA, REACH SVHC="No SVHC", RoHS=Yes, Slew Rate=0.006V/µs, Stock 1=3416, Supplier 1=Digi-Key, Unity Gain Bandwidth Product=50kHz
U9: "LAN8742A-CZ-TR - Small Footprint RMII 10/100 Ethernet, Transceiver with HP Auto-MDIX and flexPWR Technology SQFN-24", Digikey=LAN8742A-CZ-CT-ND, Digikey Link=https://www.digikey.ca/product-detail/en/microchip-technology/LAN8742A-CZ-TR/LAN8742A-CZ-CT-ND/8256089, MF="Microchip Technology", MP=LAN8742A-CZ-TR
XTAL1 XTAL1: library part "XTAL 25MHZ 8PF SMD", "25MHz ±50ppm Crystal 8pF 70 Ohms 2-SMD, No Lead", Frequency=25MHz, Load Capacitance=8pF, Package="2-SMD, No Lead", Digikey=644-1041-1-ND, Digikey Link=https://www.digikey.ca/product-detail/en/ndk-america-inc/NX5032GA-25.000000MHZ-LN-CD-1/644-1041-1-ND/1128913, ESR="70 Ohms", MF="NDK America, Inc.", MP=NX5032GA-25.000000MHZ-LN-CD-1, Price="0.95 CAD"
XTAL2: library part "XTAL 32.7680KHZ 12.5PF SMD", "32.768kHz ±20ppm Crystal 12.5pF 70 kOhms 2-SMD, No Lead", Frequency=32.768kHz, Load Capacitance=12.5pF, Package="2-SMD, No Lead", ComponentLink1Description=Digikey, ComponentLink1URL=https://www.digikey.ca/en/products/detail/ndk-america-inc/NX3215SA-32-768K-STD-MUA-8/2261469, ComponentLink2Description=Datasheet, ComponentLink2URL=https://media.digikey.com/datasheets/production/702868/1/NX3215SA-32-768K-STD-MUA-8.html, Digikey=644-1156-1-ND, Digikey Link=https://www.digikey.ca/en/products/detail/ndk-america-inc/NX3215SA-32-768K-STD-MUA-8/2261469?s=N4IgTCBcDaIGwBYEFoCMqCsc3IHIBEQBdAXyA, ESR="70 kOhms", MF="NDK America, Inc.", MP=NX3215SA-32.768K-STD-MUA-8, Price="1.04000 CAD"

## Nets (pads, with @x,y where several pads share a name; then routed paths per layer and width w, separated by ;. In a path a pad name is that pad's centre, name@x,y a point inside that pad or via, vN(x,y) a via of type N, cw(c..) or ccw(c..) an arc to the next point about the centre after c; other vN are vias at no path point)
3V3: C5.1 C31.1 C36.1 C38.1 J2.4 J3.4 J4.4 J5.4 L1.2 P1.10 P2.10 P3.10 P4.10 P5.10 U4.8 U5.8 U6.8 U7.8 U9.9
3V3_PWR_BRD: J1.19 J1.20
3V3_VDD: U1.VDD33USB
5V: P1.3 P2.3 P3.3 P4.3 P5.3
5V_PWR_BRD: J1.17 J1.18
+3V3: R68.2 U8.5 | length 0
ADC1_INP2: U1.PF11 U5.1
ADC1_INP5: U1.PB1 U4.7
ADC1_INP6: U1.PF12 U5.7
ADC1_INP9: U1.PB0 U4.1
ADC2_INP2: U1.PF13 U7.1
ADC2_INP3: U1.PA6 U6.7
ADC2_INP6: U1.PF14 U7.7
ADC3_INP1: U1.PC3 U6.1
ADC3_INP2: U1.PF9
ADC3_INP3: U1.PF7
AGND: U1.VSSA
BOTCONN1: Pbot.1 U1.PA3
BOTCONN2: Pbot.2 U1.PA4
BOTCONN4: Pbot.4 U1.PB2
BOTCONN5: Pbot.5 U1.PF15
BOTCONN6: Pbot.6 U1.PE9
BOTCONN7: Pbot.7 U1.PE10
BOTCONN8: Pbot.8 U1.PE15
CosN1: J4.5 R55.2
CosN2: J2.6 R35.2
CosN3: J3.6 R37.2
CosN4: J5.6 R57.2
CosP1: J4.6 R59.2
CosP2: J2.5 R39.2
CosP3: J3.5 R41.2
CosP4: J5.5 R61.2
ETH_CRS_DV: U1.PA7
ETH_MDC: U1.PC1 U9.13
ETH_MDIO: U1.PA2 U9.12
ETH_REF_CLK: U1.PA1
ETH_RXD0: U1.PC4
ETH_RXD1: U1.PC5
ETH_TX_EN: U1.PB11 U9.16
ETH_TXD0: U1.PB12 U9.17
ETH_TXD1: U1.PB13 U9.18
GND: C5.2 C31.2 C36.2 C37.2 C38.2 C39.2 J1.9 J1.10 J1.11 J1.12 J1.13 J1.14 J1.15 J1.16 J2.3 J3.3 J4.3 J5.3 P1.2 P1.9 P2.2 P2.9 P3.2 P3.9 P4.2 P4.9 P5.2 P5.9 R63.1 S1.1 U1.VSS U3.2 U4.4 U5.4 U6.4 U7.4 U8.2 U9.25
I2C1_SCL: U1.PB6
I2C1_SDA: U1.PB7
I2C2_SCL: Pi2c.2 U1.PF1
I2C2_SDA: Pi2c.1 U1.PF0
JTCK-SWCLK: U1.PA14
JTDI: U1.PA15
JTDO_SWO: U1.PB3
JTMS-SWDIO: U1.PA13
LA: U9.2
LAN_VDD1A: L1.1 U3.5 U9.1 U9.19
LC: 
LCONN1: Pleft.16 U1.PE2
LCONN2: Pleft.15 U1.PE3
LCONN3: Pleft.14 U1.PE4
LCONN4: Pleft.13 U1.PE5
LCONN5: Pleft.12 U1.PE6
LCONN6: Pleft.11 U1.PC13
LCONN7: Pleft.10 U1.PF2
LCONN8: Pleft.9 U1.PF3
LCONN9: Pleft.8 U1.PF4
LCONN10: Pleft.7 U1.PF5
LCONN11: Pleft.6 U1.PF6
LCONN12: Pleft.5 U1.PF8
LCONN13: Pleft.4 U1.PF10
LCONN14: Pleft.3 U1.PC0
LCONN15: Pleft.2 U1.PC2
MCU_VDD: U1.VDD
NetC32_1: R31.1 R32.2
NetC32_2: R6.1 R7.2
NetC33_1: R33.1 R34.2
NetC33_2: R29.1 R30.2
NetC34_1: R39.1 R40.2
NetC34_2: R35.1 R36.2
NetC35_1: R41.1 R42.2
NetC35_2: R37.1 R38.2
NetC37_1: C37.1 C39.1 R43.2 R44.2 R45.2 R46.2 R64.2 R65.2 R66.2 R67.2 U8.1 U8.4
NetC40_1: R51.1 R52.2
NetC40_2: R47.1 R48.2
NetC41_1: R53.1 R54.2
NetC41_2: R49.1 R50.2
NetC42_1: R59.1 R60.2
NetC42_2: R55.1 R56.2
NetC43_1: R61.1 R62.2
NetC43_2: R57.1 R58.2
NetC44_2: U9.6
NetC47_2: U9.4 XTAL1.2@4460,3029.02
NetC49_2: 
NetC50_2: U9.5 XTAL1.1@4460,2780.98
NetJ1_21: J1.21
NetJ1_22: J1.22
NetJ1_23: J1.23
NetJ1_24: J1.24
NetJ1_25: J1.25
NetJ1_26: J1.26
NetJ1_27: J1.27
NetJ1_29: J1.29
NetJ1_34: J1.34
NetJ6_1: 
NetJ6_2: 
NetJ6_3: 
NetJ6_4: 
NetJ6_6: 
NetJ6_8: 
NetPboot_1: Pboot.1 Pboot.2 U1.BOOT0
NetR1_2: U9.8
NetR2_2: U9.11
NetR7_1: R7.1 U4.2
NetR20_2: U1.PDR_ON
NetR30_1: R30.1 U5.2
NetR32_1: R32.1 R43.1 U4.3
NetR34_1: R34.1 R45.1 U5.3
NetR36_1: R36.1 U4.6
NetR38_1: R38.1 U5.6
NetR40_1: R40.1 R44.1 U4.5
NetR42_1: R42.1 R46.1 U5.5
NetR48_1: R48.1 U6.2
NetR50_1: R50.1 U7.2
NetR52_1: R52.1 R64.1 U6.3
NetR54_1: R54.1 R66.1 U7.3
NetR56_1: R56.1 U6.6
NetR58_1: R58.1 U7.6
NetR60_1: R60.1 R65.1 U6.5
NetR62_1: R62.1 R67.1 U7.5
NetR63_2: R63.2 R68.1 U8.3
NetR73_1: U9.7
NetR74_1: U9.10
NetR76_2: U9.24
NetR78_1: U9.14
NetR79_1: 
NetR80_1: 
NetUm1_1: 
NetUm1_3: 
NRST: S1.2 U1.NRST U9.15
OSC32_IN: XTAL2.2
OSC32_OUT: XTAL2.1
OSC_IN: XTAL1.2@6315,5784.02
OSC_OUT: XTAL1.1@6315,5535.98
PA8_GPIO: P1.12 U1.PA8
PA9_GPIO: P1.13 U1.PA9
PA10_GPIO: P1.14 U1.PA10
PA11_GPIO: P1.4 U1.PA11
PB15_GPIO: P4.14 U1.PB15
PC9_GPIO: P1.11 U1.PC9
PC11_GPIO: U1.PC11
PC12_GPIO: U1.PC12
PC14-OSC32_IN: U1.PC14
PC15-OSC32_OUT: U1.PC15
PD8_GPIO: P4.4 U1.PD8
PD9_GPIO: P3.13 U1.PD9
PD10_GPIO: P3.14 U1.PD10
PD15_GPIO: P3.4 U1.PD15
PE7_GPIO: P5.13 U1.PE7
PE8_GPIO: P5.14 U1.PE8
PE11_GPIO: P5.4 U1.PE11
PE12_GPIO: P4.11 U1.PE12
PE13_GPIO: P4.12 U1.PE13
PE14_GPIO: P4.13 U1.PE14
PG0_GPIO: P5.11 U1.PG0
PG1_GPIO: P5.12 U1.PG1
PG2_GPIO: P3.11 U1.PG2
PG3_GPIO: P3.12 U1.PG3
PG4_GPIO: P2.11 U1.PG4
PG5_GPIO: P2.12 U1.PG5
PG6_GPIO: P2.13 U1.PG6
PG7_GPIO: P2.14 U1.PG7
PG8_GPIO: P2.4 U1.PG8
PH0-OSC_IN: U1.PH0
PH1-OSC_OUT: U1.PH1
RA: U9.3
RC: 
RCONN1: Pright.1 U1.PB14
RCONN2: Pright.2 U1.PD11
RCONN3: Pright.3 U1.PD14
RCONN4: Pright.4 U1.PC8
RCONN5: Pright.5 U1.PA12
RD_N: U3.6 U9.22
RD_P: U3.1 U9.23
SinN1: J4.1 R47.2
SinN2: J2.1 R6.2
SinN3: J3.2 R29.2
SinN4: J5.2 R49.2
SinP1: J2.2 J4.2 R31.2 R51.2
SinP3: J3.1 R33.2
SinP4: J5.1 R53.2
SPI1_MISO: U1.PG9
SPI1_MOSI: U1.PD7
SPI1_NSS: U1.PG10
SPI1_SCLK: U1.PG11
TCONN1: Ptop.18 U1.PC10
TCONN2: Ptop.17 U1.PD0
TCONN3: Ptop.16 U1.PD1
TCONN4: Ptop.15 U1.PD2
TCONN5: Ptop.14 U1.PD3
TCONN6: Ptop.13 U1.PD4
TCONN7: Ptop.12 U1.PD5
TCONN8: Ptop.11 U1.PG12
TCONN9: Ptop.10 U1.PG13
TCONN10: Ptop.9 U1.PG14
TCONN11: Ptop.8 U1.PG15
TCONN12: Ptop.7 U1.PB4
TCONN13: Ptop.6 U1.PB5
TCONN14: Ptop.5 U1.PB8
TCONN15: Ptop.4 U1.PB9
TCONN16: Ptop.3 U1.PE0
TCONN17: Ptop.2 U1.PE1
TD_N: U3.4 U9.20
TD_P: U3.3 U9.21
TIM2_CH1: PipwmGen.1 U1.PA5
TIM2_CH3: P5.5 U1.PB10
TIM3_CH1: P2.5 U1.PC6
TIM3_CH2: P1.5 U1.PC7
TIM4_CH1: P4.5 U1.PD12
TIM4_CH2: P3.5 U1.PD13
TIM5_CH1: PipwmGen.2 U1.PA0
VBAT: U1.VBAT
VCAP: U1.VCAP
VCC: J1.1 J1.2 J1.3 J1.4 J1.5 J1.6 J1.7 J1.8 P1.1 P1.8 P2.1 P2.8 P3.1 P3.8 P4.1 P4.8 P5.1 P5.8
VDDA: U1.VDDA
VREF+: U1.VREF+
WiFi_Interrupt: U1.PD6
pads on no net: J1.28 J1.30 J1.31 J1.32 J1.33 P1.6 P1.7 P2.6 P2.7 P3.6 P3.7 P4.6 P4.7 P5.6 P5.7 Pbot.3 Pleft.1 Ptop.1 S1.3 S1.4 S1.5
copper on no net: | length 15600
  Top Layer 1 w47.24: 0,0 0,3500 4300,3500 4300,0 0,0

## Text inside footprints (layer, text, board x,y; h text height)
P1: Top Overlay "14" at 9020,5755 h50 r90; Top Overlay "7" at 9120,5755 h50 r90; Top Overlay "1" at 9120,4975 h50 r90; Top Overlay "8" at 9020,4975 h50 r90
P2: Top Overlay "14" at 8245,5755 h50 r90; Top Overlay "7" at 8345,5755 h50 r90; Top Overlay "1" at 8345,4975 h50 r90; Top Overlay "8" at 8245,4975 h50 r90
P3: Top Overlay "14" at 7985,5755 h50 r90; Top Overlay "7" at 8085,5755 h50 r90; Top Overlay "1" at 8085,4975 h50 r90; Top Overlay "8" at 7985,4975 h50 r90
P4: Top Overlay "14" at 7145,5755 h50 r90; Top Overlay "7" at 7245,5755 h50 r90; Top Overlay "1" at 7245,4975 h50 r90; Top Overlay "8" at 7145,4975 h50 r90
P5: Top Overlay "14" at 6890,5755 h50 r90; Top Overlay "7" at 6990,5755 h50 r90; Top Overlay "1" at 6990,4975 h50 r90; Top Overlay "8" at 6890,4975 h50 r90
Pleft: Top Overlay "2" at 5970,4895 h50 r90; Top Overlay "1" at 6070,4895 h50 r90; Top Overlay "15" at 6070,5755 h50 r90; Top Overlay "16" at 5970,5755 h50 r90
Ptop: Top Overlay "18" at 4685,5735 h50 r90; Top Overlay "17" at 4785,5735 h50 r90; Top Overlay "1" at 4785,4755 h50 r90; Top Overlay "2" at 4685,4735 h50 r90